# Allegro board SCHEMA_PT_PCB_FINAL.brd
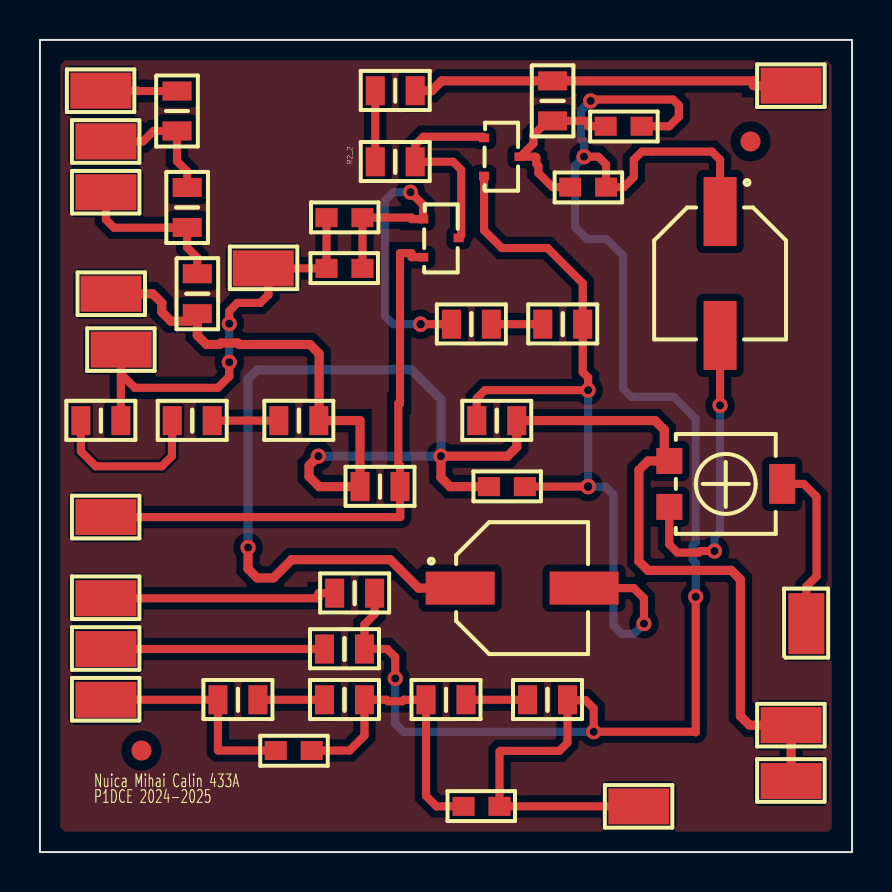
[diagram p0: board, top side]
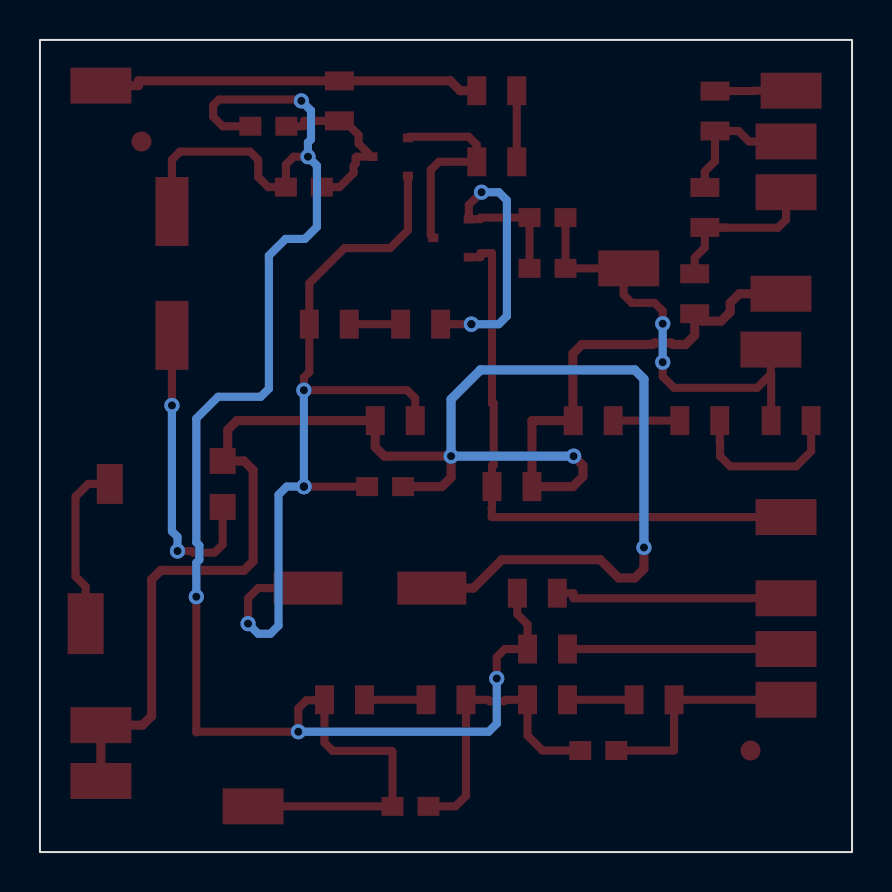
[diagram p1: board, bottom side, seen from below]

Outline 40.64 x 40.64 mm; copper layers: TOP, BOTTOM. Coordinates in mm from the lower left corner of the outline.
Outline path: rectangle 0,0 40.64,40.64

## Design rules (mm)
constraint set DEFAULT: min track width 0.127
nets with their own width: min track width 0.406; nets N27778 N27804 N27832 N27882 N27892 N27976 N28032 N28040 N28044 N28142 N28146 N28294 N28458 N28720 N28792 N28924 N28936 N28942 N28956 N29304 N30813
nets with their own width: min track width 0.457; nets 0 N27696

## Placement (name value [footprint] x y rotation side)
C1_1  4.7u  [CAPC2008X126N_0805]  15.24 31.75 0 top
C1_2  4.7u  [CAPC2008X126N_0805]  15.24 29.21 0 top
C2_1  4.7u  [CAPC2008X126N_0805]  29.21 36.32 0 top
C2_2  4.7u  [CAPC2008X126N_0805]  27.43 33.27 0 top
C3  10u  [CAPAE660X770N]  34.04 28.96 270 top
C4_1  10u  [CAPAE660X770N]  24.13 13.21 0 top
C4_2  4.7u  [CAPC2008X126N_0805]  23.37 18.29 0 top
C5  470p  [CAPC2008X126N_0805]  12.7 5.08 0 top
C6  2.2n  [CAPC2008X126N_0805]  22.1 2.29 0 top
J1  CON1  [SMD_PAD_3-05_1-80]  11.18 29.21 0 top
J2  CON1  [SMD_PAD_3-05_1-80]  3.3 16.76 0 top
J4  CON1  [SMD_PAD_3-05_1-80]  3.56 27.94 0 top
J11  CON1  [SMD_PAD_3-05_1-80]  3.05 38.1 0 top
J13  CON1  [SMD_PAD_3-05_1-80]  3.3 12.7 0 top
J17  Vcc  [SMD_PAD_3-05_1-80]  37.59 38.35 0 top
J18  OUT  [SMD_PAD_3-05_1-80]  38.35 11.43 90 top
J19  VCC GND  [SMD_PAD_3-05_1-80]  37.59 6.35 0 top
J20  OUT GND  [SMD_PAD_3-05_1-80]  37.59 3.56 0 top
J21  CON1  [SMD_PAD_3-05_1-80]  3.3 35.56 0 top
J23  CON1  [SMD_PAD_3-05_1-80]  3.3 10.16 0 top
J31  CON1  [SMD_PAD_3-05_1-80]  3.3 33.02 0 top
J33  CON1  [SMD_PAD_3-05_1-80]  3.3 7.62 0 top
NOREF  -  []  0 40.64 0 top
NOREF#2  -  [unnamed#2]  5.08 5.08 0 top
NOREF#3  -  [unnamed#2]  35.56 35.56 0 top
NOREF#4  -  []  40.64 0 90 top
P  POT  [TS53YL]  31.5 17.27 180 top
Q1  BC846B  [SOT23]  20.07 30.73 0 top
Q2  BC846B  [SOT23]  23.11 34.8 0 top
R1_1  15k  [RES2012X50N_0805]  3.05 21.59 0 top
R1_2  15k  [RES2012X50N_0805]  7.62 21.59 180 top
R1_3  10k  [RES2012X50N_0805]  12.95 21.59 180 top
R2_1  68k  [RES2012X50N_0805]  17.78 38.1 0 top
R2_2  150k  [RES2012X50N_0805]  17.78 34.54 180 top
R3  1k  [RES2012X50N_0805]  17.02 18.29 0 top
R4  15k  [RES2012X50N_0805]  25.65 37.59 90 top
R5  1k  [RES2012X50N_0805]  22.86 21.59 180 top
R6_1  330k  [RES2012X50N_0805]  21.59 26.42 0 top
R6_2  330k  [RES2012X50N_0805]  26.16 26.42 0 top
R9_1  100k  [RES2012X50N_0805]  9.91 7.62 0 top
R9_2  22k  [RES2012X50N_0805]  15.24 7.62 0 top
R10_1  1000k  [RES2012X50N_0805]  20.32 7.62 0 top
R10_2  390k  [RES2012X50N_0805]  25.4 7.62 0 top
R11  100k  [RES2012X50N_0805]  15.24 10.16 0 top
R12  220k  [RES2012X50N_0805]  15.75 12.95 0 top
R15  1Meg  [RES2012X50N_0805]  6.86 37.08 90 top
R16  100k  [RES2012X50N_0805]  7.37 32.26 90 top
R17  10k  [RES2012X50N_0805]  7.87 27.94 90 top
TP1  TEST POINT  [SMD_PAD_3-05_1-80]  29.97 2.29 0 top
TP2  TEST POINT  [SMD_PAD_3-05_1-80]  4.06 25.15 0 top

## Library data of the parts
C1_1 C1_2 C2_1 C2_2 C3 C4_1 C4_2 C5 C6 = C
J1 J2 J4 J11 J13 J17-J21 J23 J31 J33 = CON1
P = POT
Q1 Q2 = BC846B
R1_1-R1_3 R2_1 R2_2 R3-R5 R6_1 R6_2 R9_1 R9_2 R10_1 R10_2 R11 R12 R15-R17 = R
TP1 TP2 = TEST POINT

## Footprints (pads in the part's own frame, mm; a bottom-side part is the same pattern mirrored in y, then rotated)
CAPAE660X770N
  rect 3.45x1.65 smd: 1(-3.1,0) 2(3.1,0)
CAPC2008X126N_0805
  rect 1.1x0.95 smd: 1(-0.9,0) 2(0.9,0)
RES2012X50N_0805
  rect 0.95x1.45 smd: 1(-1,0) 2(1,0)
SMD_PAD_3-05_1-80
  rect 3.05x1.8 smd: 1(0,0)
SOT23
  rect 0.508x0.432 smd: 1(-0.889,0.94) 2(-0.889,-0.965) 3(0.889,0)
TS53YL
  rect 1.3x1.3 smd: 1(0,0) 3(0,-2.3)
  rect 1.3x2 smd: 2(-5.65,-1.15)
unnamed#2
  round 1 smd: (0,0)

## Nets
0: C4_1.1 C4_2.1 J4.1 J19.1 J20.1 P.3 R1_3.1 R3.1 R5.1 R17.1
N27696: J17.1 R2_1.2 R4.2
N27778: R2_1.1 R2_2.2
N27804: C2_1.1 C2_2.1 Q2.3 R4.1
N27832: C2_1.2 C2_2.2 C3.1 C6.2 R10_2.2 R11.2 R12.2 TP1.1
N27882: C3.2 P.1
N27892: Q1.3 Q2.1 R2_2.1
N27976: J11.1 R15.2
N28032: C1_1.1 C1_2.1 J1.1 R1_1.2 TP2.1
N28040: C1_1.2 C1_2.2 Q1.1 R6_1.1
N28044: C4_1.2 C4_2.2 Q2.2(E) R5.2 R6_2.2
N28142: J2.1 Q1.2(E) R3.2
N28146: J21.1 R15.1 R16.2
N28294: R6_1.2 R6_2.1
N28458: J31.1 R16.1 R17.2
N28720: J13.1 R12.1
N28792: J23.1 R11.1
N28924: C5.1 J33.1 R9_1.1
N28936: R9_1.2 R9_2.1
N28942: C5.2 C6.1 R9_2.2 R10_1.1
N28956: R10_1.2 R10_2.1
N29304: J18.1 P.2(WIPER)
N30809: R1_1.1 R1_2.2
N30813: R1_2.1 R1_3.2

## Via types
v1: diameter 0.762, hole 0.406, TOP to BOTTOM, 20 vias

## Routing (per net, layer and track width the routed paths; a pad name or vN(x,y) marks a point on that pad's centre or on a via; arc(x,y) is an arc through that point)
0: length 108.6
  TOP w0.457: J20.1 J19.1 35.51,6.35 35.05,6.81 35.05,13.64 34.59,14.1 30.43,14.1 29.97,14.55 29.97,19.11 30.43,19.57 P.3 31.24,19.83 31.24,21.13 30.78,21.59 R5.1 23.86,20.27 23.4,19.81 v1(20.07,19.81) 20.07,18.75 20.52,18.29 C4_2.1 ; J4.1 5.64,27.94 6.1,27.48 6.1,27.03 6.55,26.57 7.5,26.57 R17.1 7.87,25.86 8.33,25.4 8.97,25.4 9.05,25.48 9.9,25.48 9.98,25.4 13.51,25.4 13.97,24.94 13.97,21.61 R1_3.1 16.02,21.59 R3.1 13.97,18.29 13.47,18.79 13.47,19.35 v1(13.93,19.81) ; v1(10.41,15.24) 10.41,14.17 10.87,13.72 11.68,13.72 12.6,14.63 17.53,14.63 18.95,13.21 C4_1.1
  BOTTOM w0.457: v1(13.93,19.81) v1(20.07,19.81) 20.07,22.66 18.59,24.13 10.87,24.13 10.41,23.67 v1(10.41,15.24)
N27696: length 19.3
  TOP w0.457: J17.1 35.71,38.35 35.71,38.59 R4.2 20.1,38.59 19.61,38.1 R2_1.2
N27778: length 3.6
  TOP w0.406: R2_1.1 R2_2.2
N27804: length 9.1
  TOP w0.406: C2_2.1 25.65,33.27 24.94,33.98 24.94,34.34 24.84,34.44 24.84,34.75 24.8,34.8 24.04,34.8 ; 24.04,34.8 24.7,35.45 24.7,35.88 25.4,36.59 R4.1 27.43,36.59 27.43,36.32 C2_1.1 ; 24.04,34.8 Q2.3
N27832: length 97.1
  TOP w0.406: v1(27.23,34.8) 27.94,34.8 28.33,34.41 C2_2.2 29.21,33.27 29.72,33.78 29.72,34.65 30.12,35.05 33.63,35.05 34.04,34.65 C3.1 ; v1(27.56,37.59) 27.63,37.66 31.68,37.66 31.97,37.37 31.97,36.8 31.5,36.32 C2_1.2 ; TP1.1 C6.2 23,5.02 23.04,5.06 25.99,5.06 26.4,5.47 R10_2.2 26.43,7.59 27.3,7.59 27.71,7.19 v1(27.71,6.02) 32.79,6.02 32.82,5.99 v1(32.82,12.78) ; v1(17.78,8.69) 17.78,9.75 17.37,10.16 R11.2 16.24,11.39 16.75,11.9 R12.2
  BOTTOM w0.406: v1(27.56,37.59) 27.08,37.11 27.08,35.66 27.23,35.51 v1(27.23,34.8) 26.78,34.35 26.78,31.28 27.38,30.68 28.35,30.68 29.18,29.84 29.18,23.19 29.59,22.78 31.72,22.78 32.82,21.69 32.82,15.5 32.66,15.34 32.66,14.63 32.82,14.48 v1(32.82,12.78) ; v1(27.71,6.02) 18.19,6.02 17.78,6.43 v1(17.78,8.69)
N27882: length 15.2
  TOP w0.406: P.1 31.5,15.39 31.9,14.99 32.97,14.99 33.05,15.06 v1(33.76,15.06) ; C3.2 v1(34.04,22.35)
  BOTTOM w0.406: v1(34.04,22.35) 34.04,16.05 33.76,15.77 v1(33.76,15.06)
N27892: length 10.4
  TOP w0.406: Q1.3 21.08,30.86 21.08,34.14 20.68,34.54 R2_2.1 18.78,35.39 19.19,35.8 22.16,35.8 Q2.1
N27976: length 3.8
  TOP w0.406: J11.1 4.9,38.1 4.9,38.08 R15.2
N28032: length 22.2
  TOP w0.406: 4.06,23.92 4.05,23.92 R1_1.2 ; 4.06,23.92 4.75,23.23 8.91,23.23 9.47,23.8 v1(9.47,24.51) ; 4.06,23.92 TP2.1 ; v1(9.47,26.44) 9.47,27.08 9.88,27.48 11.02,27.48 11.43,27.89 11.43,28.96 J1.1 C1_2.1 C1_1.1
  BOTTOM w0.406: v1(9.47,24.51) v1(9.47,26.44)
N28040: length 18
  TOP w0.406: R6_1.1 v1(19.05,26.42) ; C1_2.2 C1_1.2 18.59,31.75 18.59,31.67 Q1.1 19.18,32.38 v1(18.54,33.02)
  BOTTOM w0.406: v1(18.54,33.02) 17.68,33.02 17.27,32.61 17.27,26.82 17.68,26.42 v1(19.05,26.42)
N28044: length 43.4
  TOP w0.406: Q2.2 22.23,31.11 23.11,30.23 25.4,30.23 27.16,28.46 R6_2.2 27.16,24.02 27.43,23.75 v1(27.43,23.11) 22.27,23.11 21.86,22.71 R5.2 ; C4_2.2 v1(27.43,18.29) ; v1(30.23,11.43) 30.23,12.7 29.72,13.21 C4_1.2
  BOTTOM w0.406: v1(27.43,23.11) v1(27.43,18.29) 28.3,18.29 28.7,17.88 28.7,11.33 29.11,10.92 29.72,10.92 v1(30.23,11.43)
N28142: length 29.5
  TOP w0.406: Q1.2 18.59,29.77 18.59,29.97 18.02,29.97 18.02,22.45 17.93,22.45 17.93,19.34 18.02,19.34 R3.2 18.02,17.23 18.03,17.23 18.03,16.76 J2.1
N28146: length 6.8
  TOP w0.406: R16.2 7.37,34.06 6.86,34.57 R15.1 5.68,36.08 5.16,35.56 J21.1
N28294: length 2.6
  TOP w0.406: R6_2.1 R6_1.2
N28458: length 9.2
  TOP w0.406: R16.1 6.31,31.26 ; R16.1 7.37,30.25 7.87,29.75 R17.2 ; R16.1 7.35,31.24 3.71,31.24 3.3,31.65 J31.1
N28720: length 11.7
  TOP w0.406: J13.1 13.94,12.7 13.94,12.95 R12.1
N28792: length 10.9
  TOP w0.406: J23.1 R11.1
N28924: length 11
  TOP w0.406: C5.1 8.92,5.08 8.91,5.1 R9_1.1 J33.1
N28936: length 3.3
  TOP w0.406: R9_1.2 R9_2.1
N28942: length 14.8
  TOP w0.406: C6.1 19.84,2.29 19.32,2.81 R10_1.1 18.21,7.62 18.14,7.54 17.42,7.54 17.35,7.62 R9_2.2 16.24,5.83 15.49,5.08 C5.2
N28956: length 3.1
  TOP w0.406: R10_1.2 R10_2.1
N29304: length 8.5
  TOP w0.406: P.2 38.22,18.42 38.86,17.78 38.86,13.79 38.35,13.29 J18.1
N30809: length 8.4
  TOP w0.406: R1_2.2 6.62,20.53 6.6,20.52 6.6,19.81 6.1,19.3 2.79,19.3 2.05,20.05 R1_1.1
N30813: length 3.3
  TOP w0.406: R1_2.1 R1_3.2

## Copper pours and planes (outline as drawn; the poured copper is in the pictures)
Net_1 on TOP: 1.24,1.02 1.02,1.24 1.02,39.4 1.24,39.62 39.4,39.62 39.62,39.4 39.62,1.19 39.45,1.02

## Text on the board
Ref Des/Silkscreen Top: Nuica Mihai Calin 433A | P1DCE 2024-2025
XSECTION_CHART: *  SURFACE | L1 TOP CONDUCTOR | *  DIELECTRIC | L2 BOTTOM CONDUCTOR | DESIGN CROSS SECTION CHART | ___________________________ | TOTAL THICKNESS 64.4094 MIL | 1-2
DIMENSION: FIGURE | FINISHED_SIZE | 16.0 | DRILL CHART: TOP to BOTTOM | ALL UNITS ARE IN MILS | PLATED | QTY | 20
